# Altium PCB Supply Lines.PcbDoc (part 3 of 3)
Units mil, origin at the board's own origin, x right, y up, seen from the top; angles counter-clockwise.
Board outline 2300 x 4000 mil, 4 copper layers (Top Layer 1, GND, PWR, Bottom Layer 1), stack 23.712 mil thick; 27 components, 16 nets, 73 pads, 20 vias.
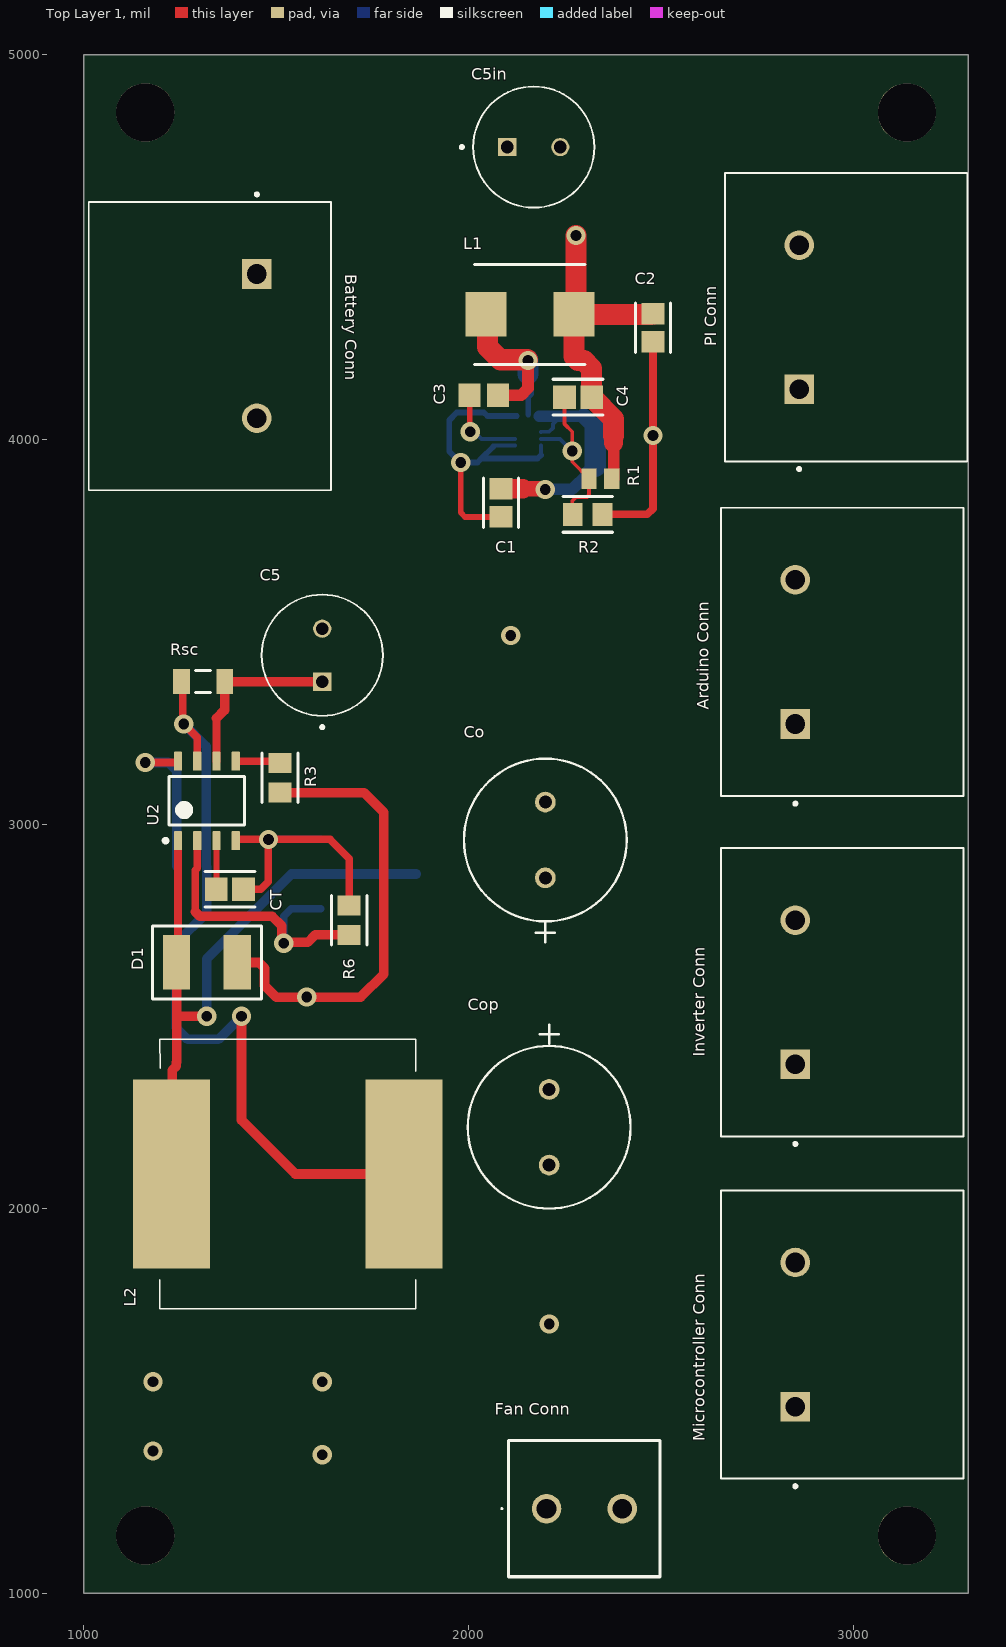
[diagram p0: Top Layer 1 view]

## Polygon pours and split planes (outlines as drawn) (continued)
+5V on PWR (split plane): 3004.93,4800 3005.22,4797.06 3006.07,4794.23 3007.47,4791.63 3009.34,4789.34 3079.34,4719.34 3081.63,4717.47 3084.23,4716.07 3087.06,4715.22 3090,4714.93 3279.9,4714.93 3279.9,2705.07 2955.07,2705.07 2955.07,2780 2954.78,2782.94 2953.93,2785.77 2952.53,2788.37 2950.66,2790.66 2890.66,2850.66 2888.37,2852.53 2885.77,2853.93 2882.94,2854.78 2880,2855.07 2780,2855.07 2777.06,2854.78 2774.23,2853.93 2771.63,2852.53 2769.34,2850.66 2705.07,2786.39 2705.07,3290 2704.78,3292.94 2703.93,3295.77 2702.53,3298.37 2700.66,3300.66 2295.07,3706.24 2295.07,3784.93 2410,3784.93 2412.94,3785.22 2415.77,3786.07 2418.37,3787.47 2420.66,3789.34 2570.66,3939.34 2572.53,3941.63 2573.93,3944.23 2574.78,3947.06 2575.07,3950 2575.07,4060 2574.78,4062.94 2573.93,4065.77 2572.53,4068.37 2570.66,4070.66 2550.66,4090.66 2548.37,4092.53 2545.77,4093.93 2542.94,4094.78 2540,4095.07 2436.24,4095.07 2405.07,4126.24 2405.07,4410 2404.78,4412.94 2403.93,4415.77 2402.53,4418.37 2400.66,4420.66 2330.66,4490.66 2328.37,4492.53 2325.77,4493.93 2322.94,4494.78 2320,4495.07 2175.07,4495.07 2175.07,4674.93 2270,4674.93 2272.94,4675.22 2275.77,4676.07 2278.37,4677.47 2280.66,4679.34 2320.66,4719.34 2322.53,4721.63 2323.93,4724.23 2324.78,4727.06 2325.07,4730 2325.07,4800 2324.78,4802.94 2323.93,4805.77 2322.53,4808.37 2320.66,4810.66 2300.66,4830.66 2298.37,4832.53 2295.77,4833.93 2292.94,4834.78 2290,4835.07 2175.07,4835.07 2175.07,4979.9 3004.93,4979.9
GND on PWR (split plane): 2914.93,4533.76 2914.93,4466.24 2893.76,4445.07 2816.24,4445.07 2805.07,4456.24 2805.07,4533.76 2826.24,4554.93 2893.76,4554.93
GND on PWR (split plane): 2294.93,4793.76 2294.93,4736.24 2263.76,4705.07 2175.07,4705.07 2175.07,4804.93 2283.76,4804.93
GND on PWR (split plane): 2894.93,3663.76 2894.93,3596.24 2873.76,3575.07 2806.24,3575.07 2795.07,3586.24 2795.07,3663.76 2816.24,3684.93 2873.76,3684.93
GND on PWR (split plane): 2924.93,2773.76 2924.93,2705.07 2776.24,2705.07 2721.32,2760 2786.24,2824.93 2873.76,2824.93
+12V on PWR (split plane): 3279.9,1020.1 3025.07,1020.1 3025.07,1213.76 3066.24,1254.93 3279.9,1254.93
GND on PWR (split plane): 2904.93,1913.76 2904.93,1816.24 2883.76,1795.07 2816.24,1795.07 2785.07,1826.24 2785.07,1913.76 2796.24,1924.93 2893.76,1924.93
GND on PWR (split plane): 2454.93,1253.76 2454.93,1196.24 2423.76,1165.07 2366.24,1165.07 2345.07,1186.24 2345.07,1253.76 2386.24,1294.93 2413.76,1294.93
no net on PWR (split plane): 2374.93,4403.76 2374.93,4120 2375.22,4117.06 2376.07,4114.23 2377.47,4111.63 2379.34,4109.34 2419.34,4069.34 2421.63,4067.47 2424.23,4066.07 2427.06,4065.22 2430,4064.93 2533.76,4064.93 2544.93,4053.76 2544.93,3956.24 2403.76,3815.07 2295.07,3815.07 2295.07,3890 2294.78,3892.94 2293.93,3895.77 2292.53,3898.37 2290.66,3900.66 2200.66,3990.66 2198.37,3992.53 2195.77,3993.93 2192.94,3994.78 2190,3995.07 2110,3995.07 2107.06,3994.78 2104.23,3993.93 2101.63,3992.53 2099.34,3990.66 1983.76,3875.07 1926.24,3875.07 1915.07,3886.24 1915.07,4213.76 2166.24,4464.93 2313.76,4464.93
GND on PWR (split plane): 1684.93,3553.76 1684.93,3466.24 1673.76,3455.07 1586.24,3455.07 1555.07,3486.24 1555.07,3543.76 1576.24,3564.93 1673.76,3564.93
no net on PWR (split plane): 1419.34,3219.34 1421.63,3217.47 1424.23,3216.07 1427.06,3215.22 1430,3214.93 2253.76,3214.93 2334.93,3133.76 2334.93,2955.07 1860,2955.07 1857.06,2954.78 1854.23,2953.93 1851.63,2952.53 1849.34,2950.66 1599.34,2700.66 1469.34,2570.66 1467.47,2568.37 1466.07,2565.77 1465.22,2562.94 1464.93,2560 1464.93,2426.24 1363.76,2325.07 1020.1,2325.07 1020.1,3324.93 1313.76,3324.93
no net on PWR (split plane): 1304.93,4776.24 1203.76,4675.07 1020.1,4675.07 1020.1,4979.9 1304.93,4979.9
GND on PWR (split plane): 1544.93,4113.76 1544.93,3996.24 1503.76,3955.07 1416.24,3955.07 1355.07,4016.24 1355.07,4103.76 1416.24,4164.93 1493.76,4164.93
Vin on PWR (split plane): 2144.93,4486.24 1889.34,4230.66 1887.47,4228.37 1886.07,4225.77 1885.22,4222.94 1884.93,4220 1884.93,3880 1885.22,3877.06 1886.07,3874.23 1887.47,3871.63 1889.34,3869.34 1909.34,3849.34 1911.63,3847.47 1914.23,3846.07 1917.06,3845.22 1920,3844.93 1990,3844.93 1992.94,3845.22 1995.77,3846.07 1998.37,3847.47 2000.66,3849.34 2116.24,3964.93 2183.76,3964.93 2264.93,3883.76 2264.93,3700 2265.22,3697.06 2266.07,3694.23 2267.47,3691.63 2269.34,3689.34 2674.93,3283.76 2674.93,2770 2675.22,2767.06 2676.07,2764.23 2677.47,2761.63 2679.34,2759.34 2759.34,2679.34 2761.63,2677.47 2764.23,2676.07 2767.06,2675.22 2770,2674.93 3279.9,2674.93 3279.9,2255.07 2766.24,2255.07 2590.66,2430.66 2365.07,2656.24 2365.07,3140 2364.78,3142.94 2363.93,3145.77 2362.53,3148.37 2360.66,3150.66 2270.66,3240.66 2268.37,3242.53 2265.77,3243.93 2262.94,3244.78 2260,3245.07 1436.24,3245.07 1330.66,3350.66 1328.37,3352.53 1325.77,3353.93 1322.94,3354.78 1320,3355.07 1020.1,3355.07 1020.1,4644.93 1210,4644.93 1212.94,4645.22 1215.77,4646.07 1218.37,4647.47 1220.66,4649.34 1330.66,4759.34 1332.53,4761.63 1333.93,4764.23 1334.78,4767.06 1335.07,4770 1335.07,4979.9 2144.93,4979.9
+12V on PWR (split plane): 2334.93,2650 2335.22,2647.06 2336.07,2644.23 2337.47,2641.63 2339.34,2639.34 2569.34,2409.34 2749.34,2229.34 2751.63,2227.47 2754.23,2226.07 2757.06,2225.22 2760,2224.93 3279.9,2224.93 3279.9,1285.07 3060,1285.07 3057.06,1284.78 3054.23,1283.93 3051.63,1282.53 3049.34,1280.66 2999.34,1230.66 2997.47,1228.37 2996.07,1225.77 2995.22,1222.94 2994.93,1220 2994.93,1020.1 1355.07,1020.1 1355.07,1190 1354.78,1192.94 1353.93,1195.77 1352.53,1198.37 1350.66,1200.66 1290.66,1260.66 1288.37,1262.53 1285.77,1263.93 1282.94,1264.78 1280,1265.07 1020.1,1265.07 1020.1,2294.93 1370,2294.93 1372.94,2295.22 1375.77,2296.07 1378.37,2297.47 1380.66,2299.34 1490.66,2409.34 1492.53,2411.63 1493.93,2414.23 1494.78,2417.06 1495.07,2420 1495.07,2553.76 1620.66,2679.34 1866.24,2924.93 2334.93,2924.93
no net on PWR (split plane): 2254.93,2143.76 2254.93,2106.24 2233.76,2085.07 2176.24,2085.07 2165.07,2096.24 2165.07,2133.76 2196.24,2164.93 2233.76,2164.93
+12V on PWR (split plane): 1324.93,1183.76 1324.93,1020.1 1020.1,1020.1 1020.1,1234.93 1273.76,1234.93
GND on GND (split plane): 3279.9,1020.1 1020.1,1020.1 1020.1,4979.9 3279.9,4979.9

## Other copper
PWR (plane layer: these items are gaps in the copper):
  lines w30: 1000,1250 1280,1250 1340,1190 1340,1010 ; 1000,2310 1370,2310 1480,2420 1480,2560 1610,2690 1860,2940 2350,2940 ; 1000,3340 1320,3340 1430,3230 2260,3230 2350,3140 2350,2650 2580,2420 2760,2240 3300,2240 ; 1010,4660 1210,4660 1320,4770 1320,5000 1470,5000 ; 2160,4690 2270,4690 2310,4730 2310,4800 2290,4820 2160,4820 ; 2160,5000 2160,4480 ; 2285,3800 2410,3800 2560,3950 2560,4060 2540,4080 2430,4080 2390,4120 2390,4410 2320,4480 2160,4480 ; 2940,2690 2940,2780 2880,2840 2780,2840 2710,2770 2690,2770 ; 3010,1000 3010,1220 3060,1270 3300,1270 ; 3020,5000 3020,4800 3090,4730 3300,4730 ; 3300,2690 2890,2690 2770,2690 2690,2770 ; 2160,4480 1900,4220 1900,3880 1920,3860 1990,3860 2110,3980 2190,3980 2280,3890 2280,3700 2690,3290 2690,2770 ; 1340,4010 1340,4110 1410,4180 1500,4180 1560,4120 1560,3990 1510,3940 1410,3940 1340,4010 ; 1540,3480 1540,3550 1570,3580 1680,3580 1700,3560 1700,3460 1680,3440 1580,3440 1540,3480 ; 2150,2090 2170,2070 2240,2070 2270,2100 2270,2150 2240,2180 2190,2180 2150,2140 2150,2090 ; 2330,1180 2360,1150 2430,1150 2470,1190 2470,1260 2420,1310 2380,1310 2330,1260 2330,1180 ; 2770,1820 2810,1780 2890,1780 2920,1810 2920,1920 2900,1940 2790,1940 2770,1920 2770,1820 ; 2780,3580 2800,3560 2880,3560 2910,3590 2910,3670 2880,3700 2810,3700 2780,3670 2780,3580 ; 2790,4450 2810,4430 2900,4430 2930,4460 2930,4540 2900,4570 2820,4570 2790,4540 2790,4450

## Text inside footprints (layer, text, board x,y; h text height)
Co: Top 3D Body "RefDes2" at 2225,2870.93 h50 r90
Cop: Top 3D Body "RefDes2" at 2185,2299.07 h50 r270